# EAGLE board LaserScanner (EAGLE 9.2.0)
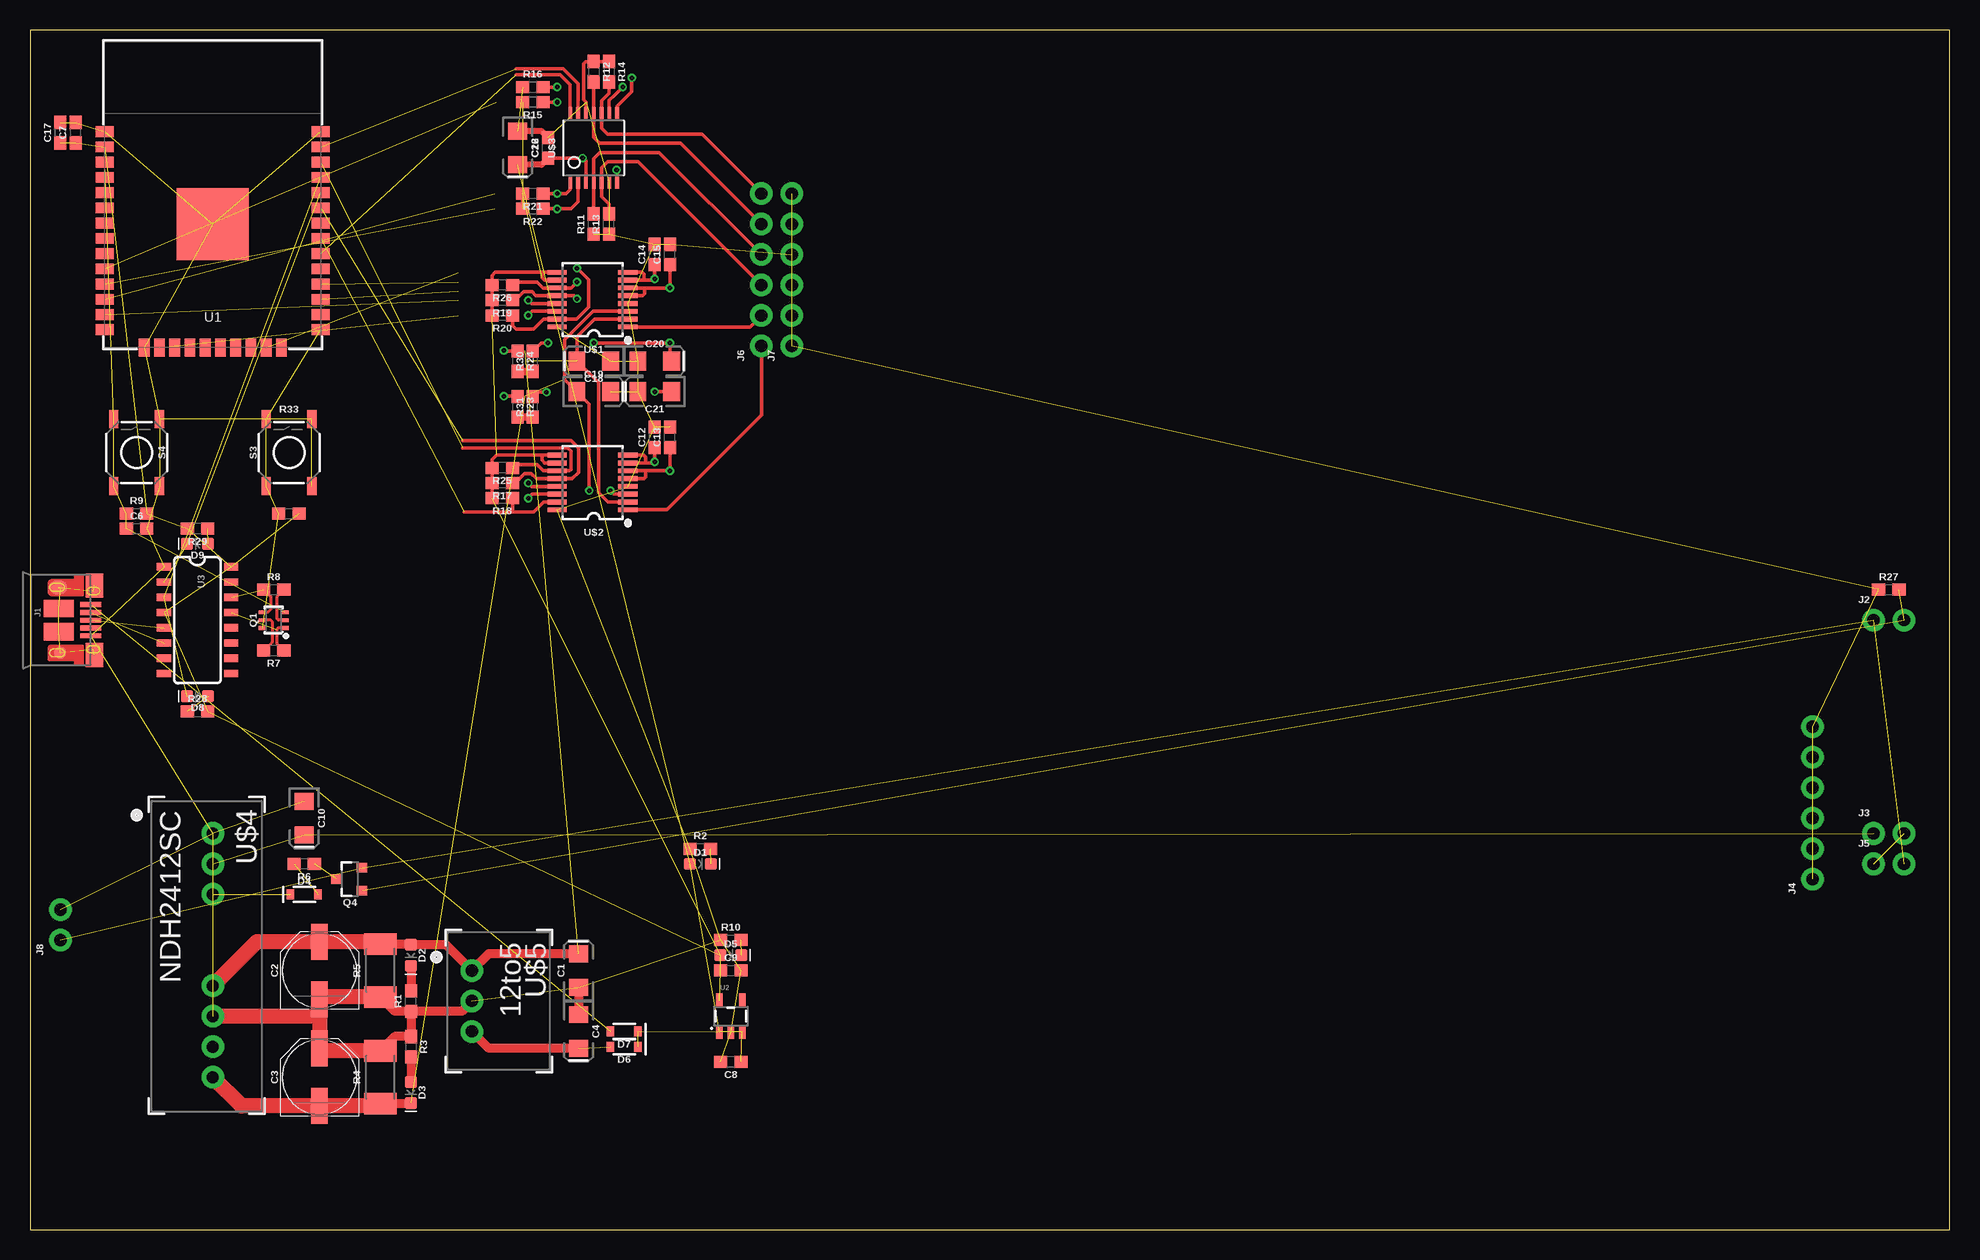
[diagram p0: board, top side]
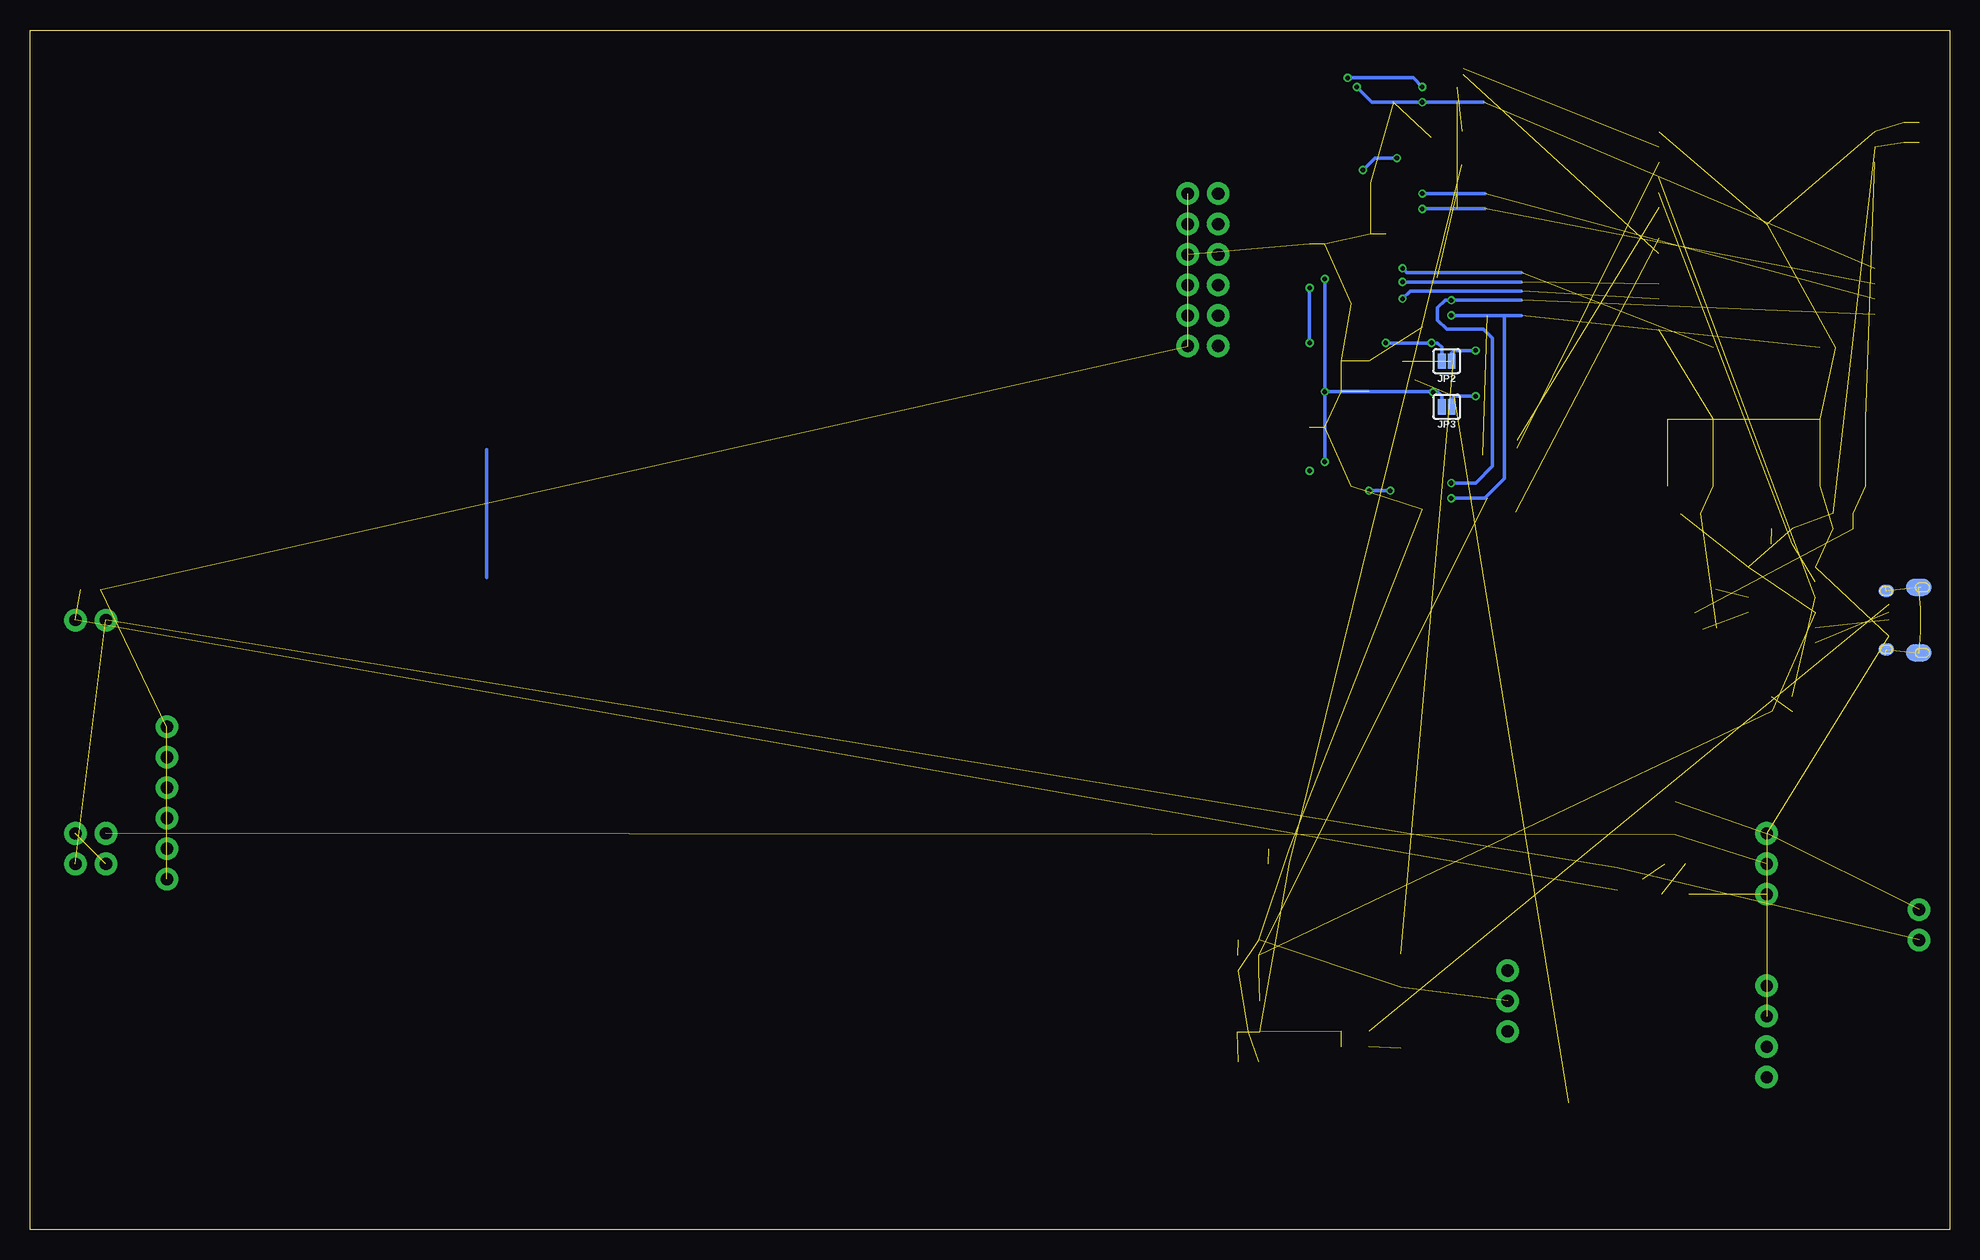
[diagram p1: board, bottom side, seen from below]

Size 160 x 100 mm. Coordinates in mm from the lower left corner, seen from the top.
Outline: 0,0 160,0 160,100 0,100 0,0
Copper layers (1*16): Top 0.035mm / dielectric 1.5mm / Bottom 0.035mm
Design rules "SparkFun-2-layer-PCBWay-LIMIT": minimum track width 6mil, minimum drill 0.3mm, track to track 6mil, track to pad 6mil, pad to pad 6mil, via to via 6mil, smd to smd 6mil, copper to edge 6mil, drill to drill 6mil, minimum pad ring 6mil, minimum via ring 6mil, stop-mask expansion 4mil, vias tented up to drill 25mil, thermal gap 10mil

## Footprints (pad centres in the part's own frame; a part is rotated, then mirrored left to right if it is on the bottom)
EIA3216 = smd 1.4 x 1.6: + 1.4,0; - -1.4,0
PANASONIC_D = smd 3 x 1.4: + 2.4,0; - -2.4,0
0603 = smd 1.1 x 1: 1 -0.85,0; 2 0.85,0
LED-0603 = smd 1 x 1: A -0.877,0; C 0.877,0
SOD-323 = smd 0.63 x 0.83: A 1.15,0; C -1.15,0
USB-MICROB-PTH-MILL = smd 0.4 x 1.75: D+ 0,0; D- -0.65,0; GND 1.3,0; ID 0.65,0; VBUS -1.3,0 | smd 2 x 1.46: SHIELD -2.9,0.275; SHIELD2 2.9,0.275 | smd 1.425 x 2.5: SHIELD3 -0.963,-2.675; SHIELD4 0.963,-2.675 | smd 1.4 x 2.1 bottom: SHIELD5 -2.731,-2.531; SHIELD7 2.729,-2.531 | smd 1 x 1: SHIELD6 2.7,-2.575 | smd 1.1 x 1.5: SHIELD8 -2.731,-2.731 | smd 1 x 1.3 bottom: SHIELD9 -2.43,0.195; SHIELD10 2.43,0.195
1X02_NO_SILK = drill 1.016 pad 1.88: 1 0,0; 2 2.54,0
1X06_NO_SILK = drill 1.016 pad 1.88: 1 0,0; 2 2.54,0; 3 5.08,0; 4 7.62,0; 5 10.16,0; 6 12.7,0
SMT-JUMPER_2_NO_SILK = smd 0.635 x 1.27: 1 -0.406,0; 2 0.406,0
SC70-6 = smd 0.3 x 0.66: 1 -0.65,-0.92; 2 0,-0.92; 3 0.65,-0.92; 4 0.65,0.92; 5 0,0.92; 6 -0.65,0.92
SOT23-3 = smd 0.8 x 0.9: 1 -0.95,-1; 2 0.95,-1; 3 0,1.1
2010 = smd 1.8 x 2.7: 1 -2.2,0; 2 2.2,0
TACTILE_SWITCH_SMD_5.2MM = smd 1.524 x 0.762: 1 -2.794,1.905; 2 2.794,1.905; 3 -2.794,-1.905; 4 2.794,-1.905
ESP-WROOM-32 = smd 0.9 x 1.5: 1 7.7,9; 2 6.43,9; 3 5.16,9; 4 3.89,9; 5 2.62,9; 6 1.35,9; 7 0.08,9; 8 -1.19,9; 9 -2.46,9; 10 -3.73,9; 11 -5,9; 12 -6.27,9; 13 -7.54,9; 14 -8.81,9; 25 -8.81,-9; 26 -7.54,-9; 27 -6.27,-9; 28 -5,-9; 29 -3.73,-9; 30 -2.46,-9; 31 -1.19,-9; 32 0.08,-9; 33 1.35,-9; 34 2.62,-9; 35 3.89,-9; 36 5.16,-9; 37 6.43,-9; 38 7.7,-9 | smd 1.5 x 0.9: 15 -10.3,5.715; 16 -10.3,4.445; 17 -10.3,3.175; 18 -10.3,1.905; 19 -10.3,0.635; 20 -10.3,-0.635; 21 -10.3,-1.905; 22 -10.3,-3.175; 23 -10.3,-4.445; 24 -10.3,-5.715 | smd 6 x 6: GND 0,0
SOT23-5 = smd 0.55 x 1.2: 1 -0.95,-1.3; 2 0,-1.3; 3 0.95,-1.3; 4 0.95,1.3; 5 -0.95,1.3
SO016 = smd 0.6 x 1.2: 1 -4.445,-2.8; 2 -3.175,-2.8; 3 -1.905,-2.8; 4 -0.635,-2.8; 5 0.635,-2.8; 6 1.905,-2.8; 7 3.175,-2.8; 8 4.445,-2.8; 9 4.445,2.8; 10 3.175,2.8; 11 1.905,2.8; 12 0.635,2.8; 13 -0.635,2.8; 14 -1.905,2.8; 15 -3.175,2.8; 16 -4.445,2.8
TSSOP16 = smd 0.4 x 1.6: 1 -2.225,-2.85; 2 -1.575,-2.85; 3 -0.925,-2.85; 4 -0.275,-2.85; 5 0.375,-2.85; 6 1.025,-2.85; 7 1.675,-2.85; 8 2.325,-2.85; 9 2.325,3.05; 10 1.675,3.05; 11 1.025,3.05; 12 0.375,3.05; 13 -0.275,3.05; 14 -0.925,3.05; 15 -1.575,3.05; 16 -2.225,3.05
TSSOP14 = smd 0.305 x 0.991: 1 -1.95,-2.918; 2 -1.3,-2.918; 3 -0.65,-2.918; 4 0,-2.918; 5 0.65,-2.918; 6 1.3,-2.918; 7 1.95,-2.918; 8 1.95,2.918; 9 1.3,2.918; 10 0.65,2.918; 11 0,2.918; 12 -0.65,2.918; 13 -1.3,2.918; 14 -1.95,2.918
NDH = drill 1.016 pad 1.88: 1 0,0; 2 2.54,0; 3 5.08,0; 6 12.7,0; 7 15.24,0; 8 17.78,0; 9 20.32,0
RE-78E = drill 1.016 pad 1.88: 1 0,0; 2 2.54,0; 3 5.08,0

## Placement (x,y rotation side)
C1  10uF  [EIA3216]  45.72,21.59 90 top
C2  [PANASONIC_D]  24.13,21.59 90 top
C3  [PANASONIC_D]  24.13,12.7 90 top
C4  10uF  [EIA3216]  45.72,16.51 270 top
C6  0.1uF  [0603]  8.89,58.42 0 top
C7  0.1uF  [0603]  3.81,91.44 90 top
C8  1.0uF  [0603]  58.42,13.97 180 top
C9  1.0uF  [0603]  58.42,21.59 0 top
C10  10uF  [EIA3216]  22.86,34.29 270 top
C12  1.0uF  [0603]  52.07,66.04 90 top
C13  1.0uF  [0603]  53.34,66.04 90 top
C14  1.0uF  [0603]  52.07,81.28 90 top
C15  1.0uF  [0603]  53.34,81.28 90 top
C16  1.0uF  [0603]  43.18,90.17 90 top
C17  1.0uF  [0603]  2.54,91.44 90 top
C18  10uF  [EIA3216]  46.99,72.39 180 top
C19  10uF  [EIA3216]  46.99,69.85 0 top
C20  10uF  [EIA3216]  52.07,72.39 0 top
C21  10uF  [EIA3216]  52.07,69.85 180 top
C22  10uF  [EIA3216]  40.64,90.17 270 top
D1  RED  [LED-0603]  55.88,30.48 0 top
D2  BLUE  [LED-0603]  31.75,22.86 270 top
D3  BLUE  [LED-0603]  31.75,11.43 270 top
D4  3A/10V/280mV  [SOD-323]  22.86,27.94 0 top
D5  RED  [LED-0603]  58.42,22.86 0 top
D6  3A/10V/280mV  [SOD-323]  49.53,15.24 180 top
D7  3A/10V/280mV  [SOD-323]  49.53,16.51 180 top
D8  GREEN  [LED-0603]  13.97,44.45 180 top
D9  Yellow  [LED-0603]  13.97,57.15 180 top
FRAME1  FRAME-LEDGER  [CREATIVE_COMMONS]  -80.01,34.29 0 top  (outside the outline)
J1  USB  [USB-MICROB-PTH-MILL]  5.08,50.8 270 top
J2  !KILL!  [1X02_NO_SILK]  153.67,50.8 0 top
J3  KEYSWITCH  [1X02_NO_SILK]  153.67,33.02 0 top
J4  [1X06_NO_SILK]  148.59,29.21 90 top
J5  ESTOP  [1X02_NO_SILK]  153.67,30.48 0 top
J6  [1X06_NO_SILK]  60.96,73.66 90 top
J7  [1X06_NO_SILK]  63.5,73.66 90 top
J8  Power Input  [1X02_NO_SILK]  2.54,24.13 90 top
JP2  JUMPER-SMT_2_NO_SILK  [SMT-JUMPER_2_NO_SILK]  41.91,72.39 180 bottom
JP3  JUMPER-SMT_2_NO_SILK  [SMT-JUMPER_2_NO_SILK]  41.91,68.58 180 bottom
Q1  MBT3904DW1T1  [SC70-6]  20.32,50.8 90 top
Q4  2.5A/30V/105mΩ  [SOT23-3]  26.67,29.21 90 top
R1  1k  [0603]  31.75,19.05 90 top
R2  1k  [0603]  55.88,31.75 0 top
R3  1k  [0603]  31.75,15.24 270 top
R4  510  [2010]  29.21,12.7 90 top
R5  510  [2010]  29.21,21.59 90 top
R6  3.3k  [0603]  22.86,30.48 180 top
R7  10k  [0603]  20.32,48.26 180 top
R8  10k  [0603]  20.32,53.34 0 top
R9  10k  [0603]  8.89,59.69 0 top
R10  1k  [0603]  58.42,24.13 0 top
R11  10k  [0603]  46.99,83.82 90 top
R12  10k  [0603]  46.99,96.52 270 top
R13  10k  [0603]  48.26,83.82 90 top
R14  10k  [0603]  48.26,96.52 270 top
R15  10k  [0603]  41.91,93.98 180 top
R16  10k  [0603]  41.91,95.25 0 top
R17  10k  [0603]  39.37,62.23 180 top
R18  10k  [0603]  39.37,60.96 180 top
R19  10k  [0603]  39.37,77.47 180 top
R20  10k  [0603]  39.37,76.2 180 top
R21  10k  [0603]  41.91,86.36 180 top
R22  10k  [0603]  41.91,85.09 180 top
R23  10k  [0603]  40.64,68.58 270 top
R24  10k  [0603]  40.64,72.39 270 top
R25  10k  [0603]  39.37,63.5 180 top
R26  10k  [0603]  39.37,78.74 180 top
R27  10k  [0603]  154.94,53.34 0 top
R28  1k  [0603]  13.97,43.18 0 top
R29  1k  [0603]  13.97,58.42 180 top
R30  10k  [0603]  41.91,72.39 90 top
R31  10k  [0603]  41.91,68.58 90 top
R33  10k  [0603]  21.59,59.69 0 top
S3  USW2  [TACTILE_SWITCH_SMD_5.2MM]  21.59,64.77 90 top
S4  USW3  [TACTILE_SWITCH_SMD_5.2MM]  8.89,64.77 90 top
U1  ESP-WROOM-32  [ESP-WROOM-32]  15.24,83.82 90 top
U2  3.3V  [SOT23-5]  58.42,17.78 0 top
U3  CH340C  [SO016]  13.97,50.8 270 top
U$1  DAC8871SBPW  [TSSOP16]  46.99,77.47 90 top
U$2  DAC8871SBPW  [TSSOP16]  46.99,62.23 90 top
U$3  DAC80004IPW  [TSSOP14]  46.99,90.17 0 top
U$4  NDH2412SC  [NDH]  15.24,33.02 270 top
U$5  12to5  [RE-78E]  36.83,21.59 270 top

## Library data of the parts
C1 C4 C10 C18-C22 = SparkFun-Capacitors; PROD_ID: CAP-00811
C2 C3 = SparkFun-Capacitors
C6 = SparkFun-Capacitors; PROD_ID: CAP-00810
C7 = SparkFun-Capacitors; PROD_ID: CAP-08604
C8 C9 = SparkFun-Capacitors; PROD_ID: CAP-00868
C12-C17 = SparkFun-Capacitors; PROD_ID: CAP-13930
D1 D5 = SparkFun-LED; PROD_ID: DIO-00819
D2 D3 = SparkFun-LED; PROD_ID: DIO-08575
D4 D6 D7 = SparkFun-DiscreteSemi; PROD_ID: DIO-14072
D8 = SparkFun-LED; PROD_ID: DIO-00821
D9 = SparkFun-LED; PROD_ID: DIO-09003
FRAME1 = SparkFun-Aesthetics
J1 = SparkFun-Connectors; PROD_ID: CONN-13711
J2 J3 J5 J8 = SparkFun-Connectors
J4 J6 J7 = SparkFun-Connectors; PROD_ID: CONN-08437
JP2 JP3 = SparkFun-Jumpers
Q1 = SparkFun-DiscreteSemi; PROD_ID: TRANS-13337
Q4 = SparkFun-DiscreteSemi; PROD_ID: TRANS-11308
R1-R3 R10 R28 R29 = SparkFun-Resistors; PROD_ID: RES-07856
R4 R5 = SparkFun-Resistors; PROD_ID: RES-08717
R6 = SparkFun-Resistors; PROD_ID: RES-07851
R7-R9 R11-R27 R30 R31 R33 = SparkFun-Resistors; PROD_ID: RES-00824
S3 S4 = SparkFun-Switches; PROD_ID: SWCH-08247; SF_SKU: COM-08720
U1 = SparkFun-RF; PROD_ID: IC-13849
U2 = SparkFun-IC-Power; PROD_ID: VREG-12457
U3 = SparkFun-IC-Comms; PROD_ID: IC-14038
U$1-U$5 = laserscanner

## Nets
0: Q1.6 R33.1 S3.1 S3.2 U1.25
3.3V: C7.1 C9.1 C17.1 D5.A R9.2 R15.2 R17.2 R18.2 R19.2 R20.2 R21.2 R22.2 R25.2 R26.2 R28.2 R29.2 R33.2 U1.2 U2.5 U3.4 U3.16 U$1.9 U$1.10 U$2.9 U$2.10
5V: C8.1 C16.1 C22.+ D1.A D6.C D7.C U2.1 U2.3 U$3.3 U$3.7
12V: C1.+ C2.+ C18.+ D2.A JP2.1 R5.2 R24.1 U$1.2 U$2.2 U$4.6 U$5.1
!DTR: Q1.1 R7.1 U3.13
!KILL: J2.2 Q4.1 R27.2
!RTS: Q1.4 R8.1 U3.14
-12V: C3.- C19.- D3.C JP3.1 R4.1 R23.1 U$1.3 U$2.3 U$4.9
AUX_OUT: J6.6 R14.2 U$3.10
D+: J1.D+ U3.5
D-: J1.D- U3.6
G_MOSI: U1.16 U$1.14 U$2.14
G_SCLK: U1.13 U$1.13 U$2.13
GND: C1.- C2.- C3.+ C4.- C6.2 C7.2 C8.2 C9.2 C10.- C12.2 C13.2 C14.2 C15.2 C16.2 C17.2 C18.- C19.+ C20.- C21.+ C22.- J1.GND J4.1 J4.2 J4.3 J4.4 J4.5 J4.6 J7.1 J7.2 J7.3 J7.4 J7.5 J7.6 J8.2 R1.1 R2.1 R3.1 R4.2 R5.1 R10.1 R11.1 R12.1 R13.1 R14.1 R16.1 R27.1 S3.3 S3.4 S4.3 S4.4 U1.1 U1.15 U1.38 U1.GND U2.2 U3.1 U$1.4 U$1.16 U$2.4 U$2.16 U$3.6 U$3.12 U$4.1 U$4.7 U$5.2
GX_!CS: R17.1 U1.33 U$2.12
GX_!LDAC: R18.1 U1.31 U$2.15
GX_!RST: R25.1 U1.36 U$2.11
GX_OUT: J6.1 U$2.1
GY_!CS: R19.1 U1.27 U$1.12
GY_!LDAC: R20.1 U1.23 U$1.15
GY_!RST: R26.1 U1.28 U$1.11
GY_OUT: J6.2 U$1.1
L_!CLR: R15.1 U1.10 U$3.9
L_!LDAC: R21.1 U1.12 U$3.1
L_!SYNC: R22.1 U1.11 U$3.2
L_MOSI: U1.37 U$3.13
L_SCLK: U1.30 U$3.14
LASER_B: J6.3 R13.2 U$3.5
LASER_G: J6.5 R12.2 U$3.11
LASER_R: J6.4 R11.2 U$3.4
N$1: D1.C R2.2
N$2: R16.2 U$3.8
N$3: D2.C R1.2
N$4: D4.A R6.2
N$5: D3.A R3.2
N$6: D5.C R10.2
N$7: C4.+ D6.A U$5.3
N$8: U1.26
N$9: J3.2 J5.1
N$10: Q1.5 R7.2
N$11: U1.29
N$12: Q1.2 R8.2
N$13: D8.A R28.1
N$14: D9.A R29.1
N$15: R24.2 R30.1
N$16: R23.2 R31.1
N$22: U1.8
N$23: U1.9
N$24: U1.6
N$25: U1.7
RESET: C6.1 Q1.3 R9.1 S4.1 S4.2 U1.3
RXI: D9.C U1.34 U3.2
SHIELD: J1.SHIELD J1.SHIELD2 J1.SHIELD3 J1.SHIELD4 J1.SHIELD5 J1.SHIELD6 J1.SHIELD7 J1.SHIELD8 J1.SHIELD9 J1.SHIELD10
SHTDWN: Q4.3 R6.1
SHTDWN_BASE: D4.C U$4.3
TXO: D8.C U1.35 U3.3
V_USB: D7.A J1.VBUS
VCC: J2.1 J5.2 J8.1 Q4.2
VCC_SWITCHED: C10.+ J3.1 U$4.2
VREFH: C13.1 C15.1 C20.+ JP2.2 R30.2 U$1.5 U$1.6 U$2.5 U$2.6
VREFL: C12.1 C14.1 C21.- JP3.2 R31.2 U$1.7 U$1.8 U$2.7 U$2.8

## Tracks (layer width: path | path; a pad name or v marks a point on that pad's centre or on a via)
0  (4 unrouted)
3.3V  (15 unrouted)
  Top 0.305: U$1.9 42.67,79.8 | 42.67,79.8 38.77,79.8 38.52,79.54 R26.2 R19.2 R20.2 | U$1.10 42.9,79.14 42.67,79.38 42.67,79.8 | U$2.9 42.67,64.56 | 42.67,64.56 38.9,64.56 38.52,64.17 R25.2 R17.2 R18.2 | U$2.10 42.9,63.91 42.67,64.14 42.67,64.56 | R21.2 R22.2
5V  (via drill 0.38)  (6 unrouted)
  Top 0.305: U$3.3 46.34,89.04 v46.06,89.32 C16.1 | U$3.7 48.94,88.28 v48.9,88.33
  Top 0.508: C16.1 42.63,88.77 C22.+
  Bottom 0.305: v48.9,88.33 47.9,89.32 v46.06,89.32
12V  (via drill 0.38)  (2 unrouted)
  Top 0.305: U$1.2 47.07,75.89 45.59,74.42 C18.+ 47.38,70.59 47.38,61.45 48.18,60.66 U$2.2 | R24.1 39.54,73.24 v39.5,73.28
  Top 0.762: R5.2 31.7,23.79 D2.A 34.68,23.74 U$5.1 38.23,22.99 C1.+
  Top 1.27: U$4.6 18.91,23.99 C2.+ 29.01,23.99 R5.2
  Bottom 0.305: v39.5,73.28 41.27,73.28 41.5,73.05 JP2.1
!DTR  (1 unrouted)
  Top 0.254: Q1.1 20.69,50.15 20.57,50.04 20.57,48.86 R7.1
!KILL  (2 unrouted)
!RTS  (1 unrouted)
  Top 0.254: Q1.4 19.83,51.45 20.07,51.69 20.07,52.74 R8.1
-12V  (via drill 0.38)  (2 unrouted)
  Top 0.305: U$1.3 46.95,76.55 44.58,74.17 44.58,70.86 C19.- 46.61,68.83 v46.61,61.59 | U$2.3 48.68,61.3 v48.39,61.59 | v39.5,69.47 40.6,69.47 R23.1
  Top 0.762: R4.1 31.7,10.5 D3.C
  Top 1.27: U$4.9 17.64,10.3 C3.- 29.01,10.3 R4.1
  Bottom 0.305: v48.39,61.59 v46.61,61.59 | JP3.1 41.5,69.24 41.27,69.47 v39.5,69.47
AUX_OUT
  Top 0.305: R14.2 48.26,94.74 47.64,94.12 U$3.10 47.64,91.81 48.13,91.31 56.01,91.31 J6.6
D+  (1 unrouted)
D-  (1 unrouted)
G_MOSI  (via drill 0.38)  (1 unrouted)
  Top 0.305: U$1.14 41.87,76.55 v41.53,76.2 | U$2.14 41.87,61.3 v41.53,60.96
  Bottom 0.305: v41.53,76.2 37.08,76.2 | 37.08,76.2 35.69,76.2 | v41.53,60.96 38.73,60.96 37.08,62.61 37.08,76.2
G_SCLK  (via drill 0.38)  (1 unrouted)
  Top 0.305: U$1.13 41.8,77.19 v41.53,77.47 | U$2.13 41.8,61.95 v41.53,62.23
  Bottom 0.305: 35.69,77.47 v41.53,77.47 42.04,77.47 42.67,76.83 42.67,75.82 41.91,75.06 38.86,75.06 38.1,74.3 38.1,63.63 39.5,62.23 v41.53,62.23
GND  (53 unrouted)
  Top 0.305: U$3.12 46.34,94 46.15,94.19 46.15,97.2 46.32,97.37 R12.1 R14.1
  Top 0.508: C22.- 42.63,91.57 C16.2
  Top 0.762: R1.1 R3.1 30.4,16.09 R4.2 | R1.1 30.4,18.2 R5.1 | C1.- C4.- | R1.1 35.98,18.2 U$5.2
  Top 1.27: R4.2 24.33,14.9 C3.+ 24.13,17.78 | 24.13,17.78 C2.- 24.33,19.39 R5.1 | 24.13,17.78 U$4.7
GX_!CS  (1 unrouted)
  Top 0.305: R17.1 40.43,62.23 41.23,63.03 41.78,63.03 42.21,62.6 U$2.12 45.21,62.6 45.72,63.12 45.72,65.15 45.09,65.79 36.07,65.79
GX_!LDAC  (1 unrouted)
  Top 0.305: U$2.15 42.8,60.66 41.96,59.82 40.26,59.82 | 40.26,59.82 36.2,59.82 | R18.1 40.22,59.86 40.26,59.82
GX_!RST  (1 unrouted)
  Top 0.305: R25.1 40.47,63.75 42.29,63.75 42.79,63.26 U$2.11 44.97,63.26 45.09,63.37 45.09,64.9 44.83,65.15 36.07,65.15
GX_OUT
  Top 0.305: U$2.1 53.09,60.01 60.96,67.88 J6.1
GY_!CS  (via drill 0.38)  (1 unrouted)
  Top 0.305: R19.1 40.24,77.49 40.45,77.49 41.13,78.17 41.84,78.17 42.16,77.84 U$1.12 45.34,77.84 v45.59,77.6
  Bottom 0.305: v45.59,77.6 44.96,78.23 35.69,78.23
GY_!LDAC  (via drill 0.38)  (1 unrouted)
  Top 0.305: R20.1 40.22,75.35 40.51,75.06 41.96,75.06 42.8,75.89 U$1.15 45.54,75.89 46.55,76.9 46.55,79.18 v45.59,80.14
  Bottom 0.305: v45.59,80.14 45.21,79.76 35.69,79.76
GY_!RST  (via drill 0.38)  (1 unrouted)
  Top 0.305: R26.1 40.47,78.99 42.29,78.99 42.79,78.5 U$1.11 45.09,78.5 v45.59,78.99
  Bottom 0.305: v45.59,78.99 35.69,78.99
GY_OUT
  Top 0.305: J6.2 60.01,75.25 U$1.1
L_!CLR  (via drill 0.38)  (1 unrouted)
  Top 0.305: v43.94,93.98 R15.1 | v49.4,95.25 48.72,94.56 48.72,94.55 48.29,94.12 U$3.9
  Bottom 0.305: v49.4,95.25 48.13,93.98 v43.94,93.98 38.86,93.98
L_!LDAC  (via drill 0.38)  (1 unrouted)
  Top 0.305: U$3.1 45.04,86.7 44.7,86.36 v43.94,86.36 R21.1
  Bottom 0.305: v43.94,86.36 38.73,86.36
L_!SYNC  (via drill 0.38)  (1 unrouted)
  Top 0.305: R22.1 v43.94,85.09 45.09,85.09 45.69,85.69 U$3.2
  Bottom 0.305: v43.94,85.09 38.73,85.09
L_MOSI  (1 unrouted)
  Top 0.305: U$3.13 45.69,95.53 44.45,96.77 40.51,96.77
L_SCLK  (1 unrouted)
  Top 0.305: U$3.14 45.04,95.42 44.2,96.27 40.51,96.27
LASER_B
  Top 0.305: R13.2 48.26,85.47 47.62,86.11 47.62,87.24 U$3.5 47.64,88.53 48.13,89.03 50.67,89.03 J6.3
LASER_G
  Top 0.305: R12.2 U$3.11 46.99,91.06 47.5,90.55 54.23,90.55 J6.5
LASER_R
  Top 0.305: R11.2 U$3.4 46.99,89.28 47.5,89.79 52.45,89.79 J6.4
N$1  (1 unrouted)
N$2  (via drill 0.38)
  Top 0.305: U$3.8 48.94,93.64 50.16,94.87 v50.16,96.01 | v43.94,95.25 R16.2
  Bottom 0.305: v50.16,96.01 44.7,96.01 v43.94,95.25
N$3
  Top 0.762: D2.C R1.2
N$4  (1 unrouted)
N$5
  Top 0.762: R3.2 D3.A
N$6  (1 unrouted)
N$7  (1 unrouted)
  Top 0.762: U$5.3 38.23,15.11 C4.+
N$9  (1 unrouted)
N$10
  Top 0.254: R7.2 20.17,48.96 20.17,50.7 20.07,50.8 Q1.5
N$12
  Top 0.254: Q1.2 20.7,50.8 20.57,50.93 20.57,52.74 R8.2
N$13  (1 unrouted)
N$14  (1 unrouted)
N$15
  Top 0.61: R30.1 R24.2
N$16
  Top 0.61: R31.1 R23.2
RESET  (5 unrouted)
RXI  (2 unrouted)
SHIELD  (9 unrouted)
SHTDWN  (1 unrouted)
SHTDWN_BASE  (1 unrouted)
TXO  (2 unrouted)
V_USB  (1 unrouted)
VCC  (3 unrouted)
VCC_SWITCHED  (2 unrouted)
VREFH  (via drill 0.38)
  Top 0.305: 51.31,63.26 U$2.6 | 51.31,63.26 v53.34,63.26 C13.1 | 51.23,78.5 U$1.6 | U$1.5 51.05,77.84 51.23,78.03 51.23,78.5 | C15.1 v53.34,78.5 51.23,78.5 | U$2.5 51.17,62.6 51.31,62.74 51.31,63.26 | C20.+ 53.34,72.52 v53.34,73.91 v46.99,73.91 | R30.2 42.58,73.91 v43.18,73.91
  Bottom 0.305: v53.34,78.5 v53.34,73.91 | 121.92,65.02 121.92,54.37 | v46.99,73.91 v43.18,73.91 42.67,73.91 42.32,73.56 JP2.2
VREFL  (via drill 0.38)
  Top 0.305: 51.18,79.14 U$1.7 | 51.18,79.14 51.97,79.14 v52.07,79.25 C14.1 | U$1.8 51.02,79.8 51.18,79.63 51.18,79.14 | 51.31,63.91 U$2.7 | 51.31,63.91 51.97,63.91 v52.07,64.01 C12.1 | U$2.8 51.14,64.56 51.31,64.39 51.31,63.91 | C21.- 53.34,69.72 53.21,69.85 v52.07,69.85 | v43.05,69.81 42.29,69.81 R31.2
  Bottom 0.305: v52.07,79.25 v52.07,69.85 | v52.07,69.85 v52.07,64.01 | v52.07,69.85 43.09,69.85 v43.05,69.81 42.63,69.81 42.32,69.49 JP3.2